# EAGLE board dome-board (EAGLE 5.09)
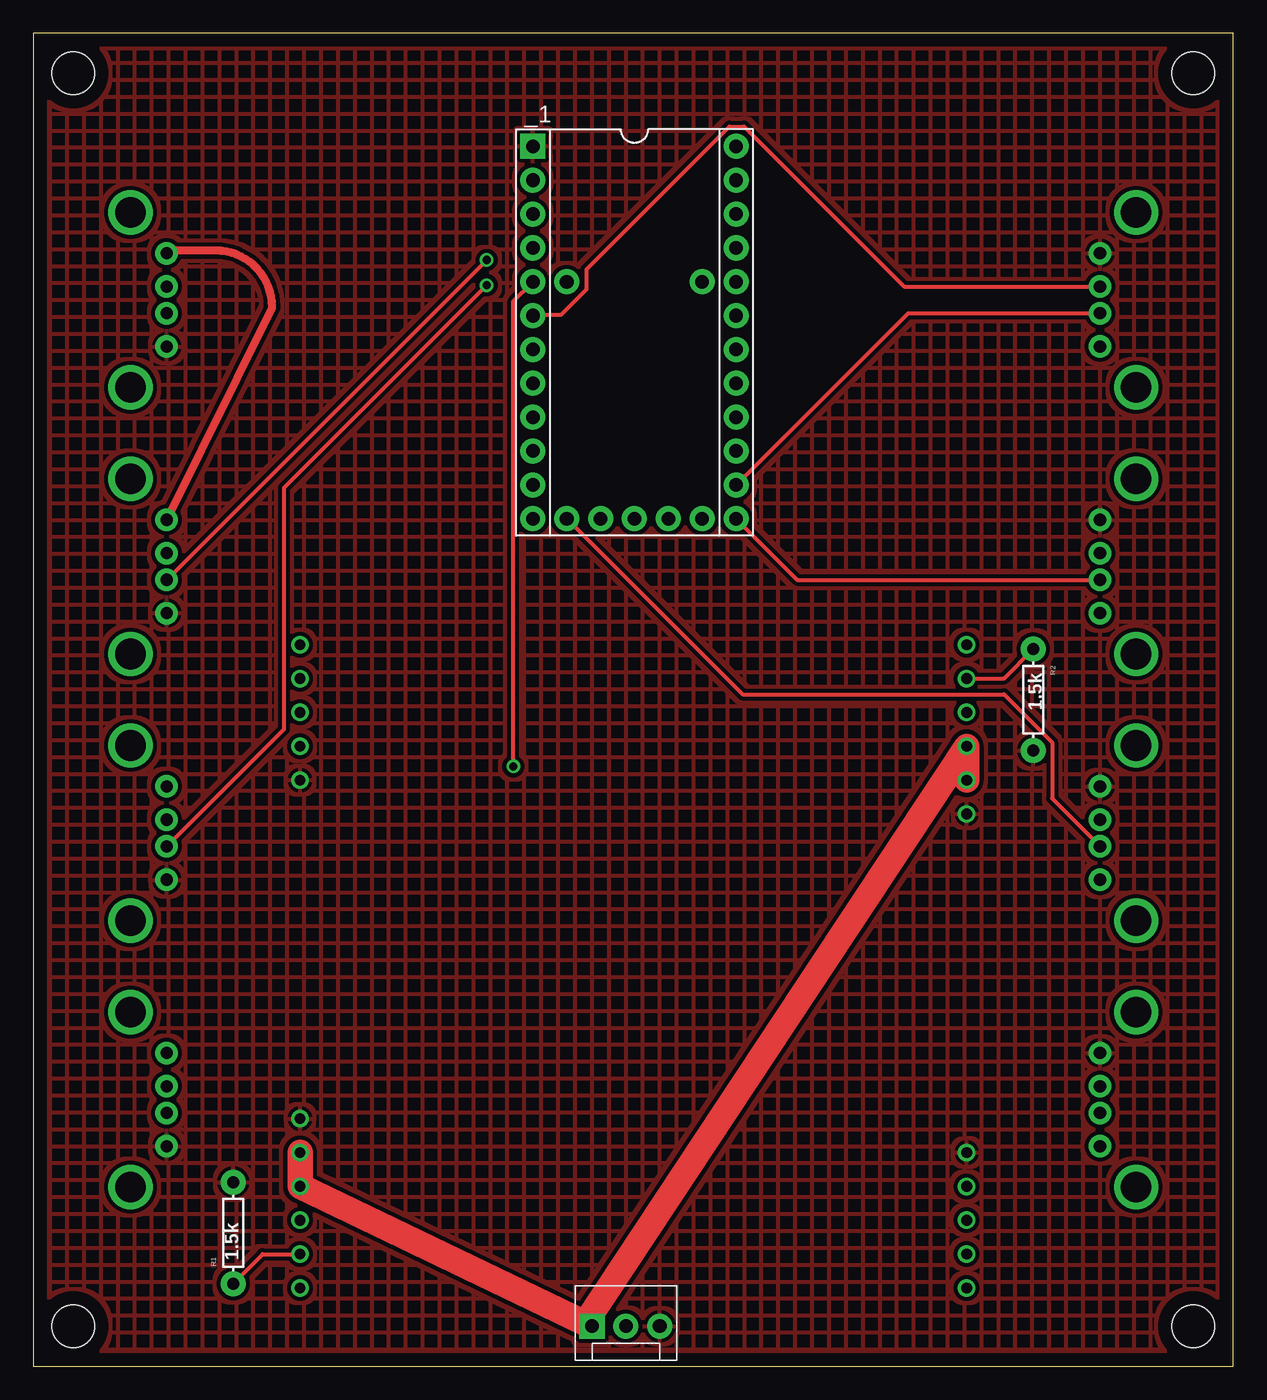
[diagram p0: board, top side]
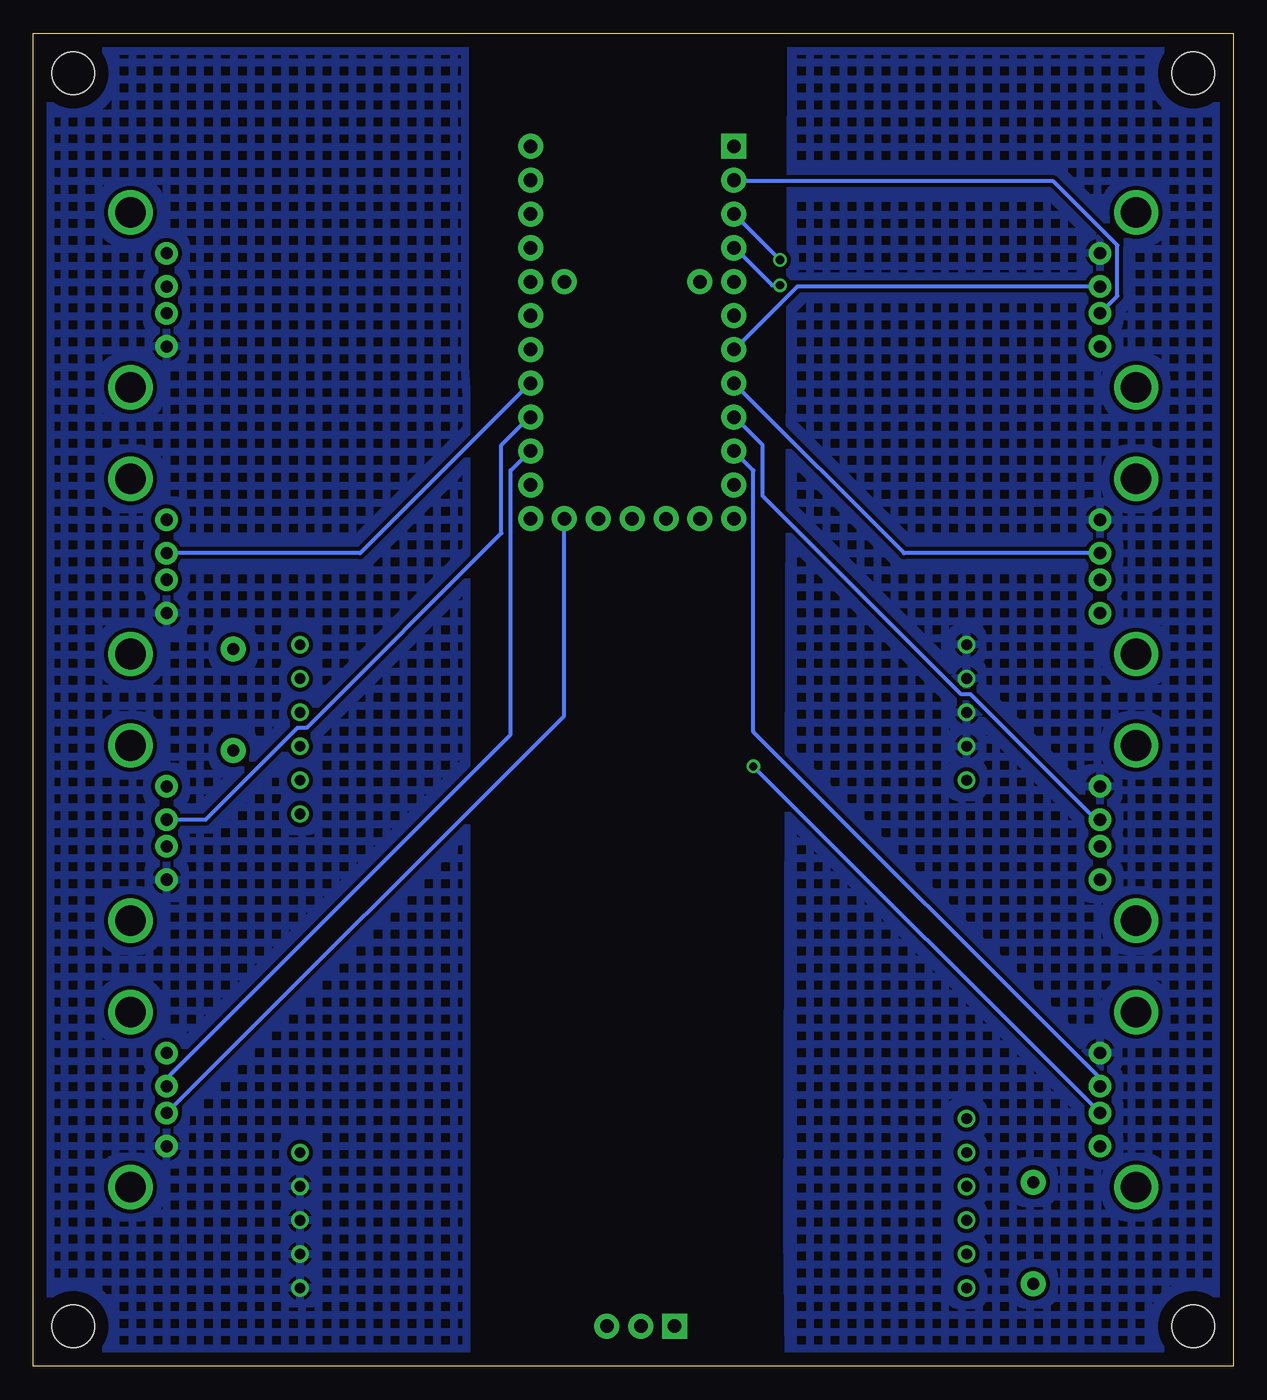
[diagram p1: board, bottom side, seen from below]

Size 90 x 100 mm. Coordinates in mm from the lower left corner, seen from the top.
Outline: 0,0 90,0 90,100 0,100 0,0
Copper layers (1*16): Top 0.035mm / dielectric 1.5mm / Bottom 0.035mm
Design rules "default": minimum track width 10mil, minimum drill 24mil, track to track 8mil, track to pad 8mil, pad to pad 8mil, via to via 8mil, smd to smd 8mil, copper to edge 40mil, drill to drill 8mil, minimum pad ring 10mil, minimum via ring 8mil, stop-mask expansion 4mil, vias tented up to drill 0mil, thermal gap 10mil
Net classes: 0 default: width 0.305 mm, clearance 0.305 mm; 1 power: width 3.124 mm, clearance 0.635 mm
Holes 3.2 mm at 3,3 3,97 87,97 87,3

## Footprints (pad centres in the part's own frame; a part is rotated, then mirrored left to right if it is on the bottom)
TEENSY = drill 1.016 pad 1.88 round: 5V2 13.97,-2.54; +5V -13.97,7.62; B0 -11.43,-7.62; B1 -8.89,-7.62; B2 -6.35,-7.62; B3 -3.81,-7.62; B4 8.89,7.62; B5 6.35,7.62; B6 3.81,7.62; B7 -1.27,-7.62; C6 11.43,-7.62; C7 13.97,-7.62; D0 1.27,-7.62; D1 3.81,-7.62; D2 6.35,-7.62; D3 8.89,-7.62; D4 13.97,5.08; D5 13.97,-5.08; D6 13.97,7.62; D7 11.43,7.62; E6 -3.81,-5.08; F0 -11.43,7.62; F1 -8.89,7.62; F4 -6.35,7.62; F5 -3.81,7.62; F6 -1.27,7.62; F7 1.27,7.62; GRND1 13.97,0; REF -3.81,5.08; RST 13.97,2.54 | drill 1.016 pad 1.88 square: GND -13.97,-7.62
OKX2-T/16-D12P-C = drill 0.8 round: GND@1 13.97,0; GND@2 -11.43,0; NC -19.05,0; ON/OFF -24.13,0; SENSE 19.05,0; TRIM -21.59,0; VIN@1 -13.97,0; VIN@2 -16.51,0; VOUT@1 24.13,0; VOUT@2 21.59,0; VOUT@3 16.51,0
MOLEX-1X3 = drill 1.016 pad 1.88 square: 1 0,0 | drill 1.016 pad 1.88 round: 2 2.54,0; 3 5.08,0
AXIAL-0.3 = drill 0.9 pad 1.88 round: P$1 -3.81,0; P$2 3.81,0
USBA = drill 0.92 pad 1.676 round: D+ 0,-1; D- 0,1; GND 0,-3.5; VBUS 0,3.5 | drill 2.3 round: GND2 -2.71,-6.57; GND3 -2.71,6.57

## Placement (x,y rotation side)
_1  TEENSY  [TEENSY]  45.09,77.55 270 top
DC1  OKX2-T/16-D12P-C  [OKX2-T/16-D12P-C]  20,30 90 top
DC2  OKX2-T/16-D12P-C  [OKX2-T/16-D12P-C]  70,30 270 top
JP1  VIN  [MOLEX-1X3]  41.9,3 0 top
R1  1.5k  [AXIAL-0.3]  15,10 90 top
R2  1.5k  [AXIAL-0.3]  75,50 270 top
USB1  USB  [USBA]  10,80 0 top
USB2  USB  [USBA]  10,60 0 top
USB3  USB  [USBA]  10,40 0 top
USB4  USB  [USBA]  10,20 0 top
USB5  USB  [USBA]  80,20 180 top
USB6  USB  [USBA]  80,40 180 top
USB7  USB  [USBA]  80,60 180 top
USB8  USB  [USBA]  80,80 180 top

## Library data of the parts
_1 = teensy
DC1 DC2 USB1-USB8 = MaxHenstell
JP1 R1 R2 = SparkFun

## Nets
GND: _1.GND DC1.GND@1 DC1.GND@2 DC2.GND@1 DC2.GND@2 JP1.3 R1.P$2 R2.P$2 USB1.GND USB2.GND USB3.GND USB4.GND USB5.GND USB6.GND USB7.GND USB8.GND
N$1: _1.B0 USB1.D+
N$2: _1.B1 USB2.D+
N$3: _1.B2 USB3.D+
N$4: _1.B3 USB4.D+
N$5: _1.B4 USB5.D+
N$6: _1.B5 USB6.D+
N$7: _1.B6 USB7.D+
N$8: _1.B7 USB8.D+
N$9: _1.D0 USB1.D-
N$10: _1.D1 USB2.D-
N$11: _1.D2 USB3.D-
N$12: _1.D3 USB4.D-
N$13: _1.D4 USB5.D-
N$14: _1.D5 USB6.D-
N$15: _1.D6 USB7.D-
N$16: _1.D7 USB8.D-
N$17: DC1.TRIM R1.P$1
N$19: DC2.TRIM R2.P$1
VCC1: DC1.SENSE DC1.VOUT@1 DC1.VOUT@2 DC1.VOUT@3 USB1.VBUS USB2.VBUS USB3.VBUS USB4.VBUS
VCC2: DC2.SENSE DC2.VOUT@1 DC2.VOUT@2 DC2.VOUT@3 USB5.VBUS USB6.VBUS USB7.VBUS USB8.VBUS
VIN: DC1.VIN@1 DC1.VIN@2 DC2.VIN@1 DC2.VIN@2 JP1.1

## Tracks (layer width: path | path; a pad name or v marks a point on that pad's centre or on a via)
GND
  pour Top (hatched): 0.5,99.8 90,99.8 90,0 0.3,0 0.3,99.8
N$1
  Bottom 0.305: USB1.D+ 8.7,80.3 8.7,84.1 13.5,88.9 37.4,88.9 _1.B0
N$2  (via drill 0.61)
  Top 0.305: USB2.D+ v34,83
  Bottom 0.305: v34,83 37.4,86.4 _1.B1
N$3  (via drill 0.61)
  Top 0.305: USB3.D+ 18.8,47.8 18.8,65.9 v34,81.1
  Bottom 0.305: v34,81.1 34.6,81.1 37.4,83.9 _1.B2
N$4  (via drill 0.61)
  Top 0.305: v36,45 36,79.9 37.4,81.3 _1.B3
  Bottom 0.305: USB4.D+ v36,45
N$5
  Bottom 0.305: USB5.D+ 80,21.6 54.2,47.4 54.2,67.2 52.8,68.6 _1.B4
N$6
  Bottom 0.305: USB6.D+ 77.1,41 70.2,47.9 69.5,47.9 54.9,62.5 54.9,69.1 52.8,71.2 _1.B5
N$7
  Bottom 0.305: USB7.D+ 65.5,61 52.8,73.7 _1.B6
N$8
  Top 0.305: USB8.D+ 65.3,81 53.3,93 52.2,93 41.5,82.3 41.5,80.8 39.6,78.9 37.5,78.9 _1.B7
N$9
  Bottom 0.305: USB1.D- 32.7,81 37.4,76.3 _1.D0
N$10
  Bottom 0.305: USB2.D- 24.7,61 37.4,73.7 _1.D1
N$11
  Bottom 0.305: USB3.D- 10.3,41 19.7,50.4 20.4,50.4 35.3,65.3 35.3,69.1 37.4,71.2 _1.D2
N$12
  Bottom 0.305: USB4.D- 10,21.6 36,47.6 36,67.2 37.4,68.6 _1.D3
N$13
  Bottom 0.305: USB5.D- 50.2,48.8 50.2,63.5 _1.D4
N$14
  Top 0.305: USB6.D- 76.4,42.6 76.4,46.8 72.8,50.4 53.2,50.4 40.1,63.5 _1.D5
N$15
  Top 0.305: USB7.D- 57.3,59 52.8,63.5 _1.D6
N$16
  Top 0.305: USB8.D- 65.6,79 52.8,66.2 _1.D7
N$17
  Top 0.305: DC1.TRIM 17.2,8.4 R1.P$1
N$19
  Top 0.305: DC2.TRIM 72.8,51.6 R2.P$1
VCC1
  Top 0.61: USB2.VBUS 17.9,79.4 17.9,79.5 arc90 13.7,83.7 10.2,83.7 arc90 USB1.VBUS
  pour Bottom (hatched): 0.6,99.5 30.4,99.4 33.2,99.4 33.5,10 33.4,0.7 0.6,1 0.6,16 0.7,16 0.7,99.3
VCC2
  pour Bottom (hatched): 57.9,99.2 89.2,99.4 89.5,88.2 89.4,88.2 89.4,0.8 57.5,0.8 57.5,73.3 57.6,75 57.6,99.2
VIN
  Top 1.93: 41.41,3.23 DC1.VIN@2 DC1.VIN@1 | 41.41,3.23 JP1.1 | 41.41,3.23 DC2.VIN@2 DC2.VIN@1